# EAGLE board ShutdownThree (EAGLE 7.7.0)
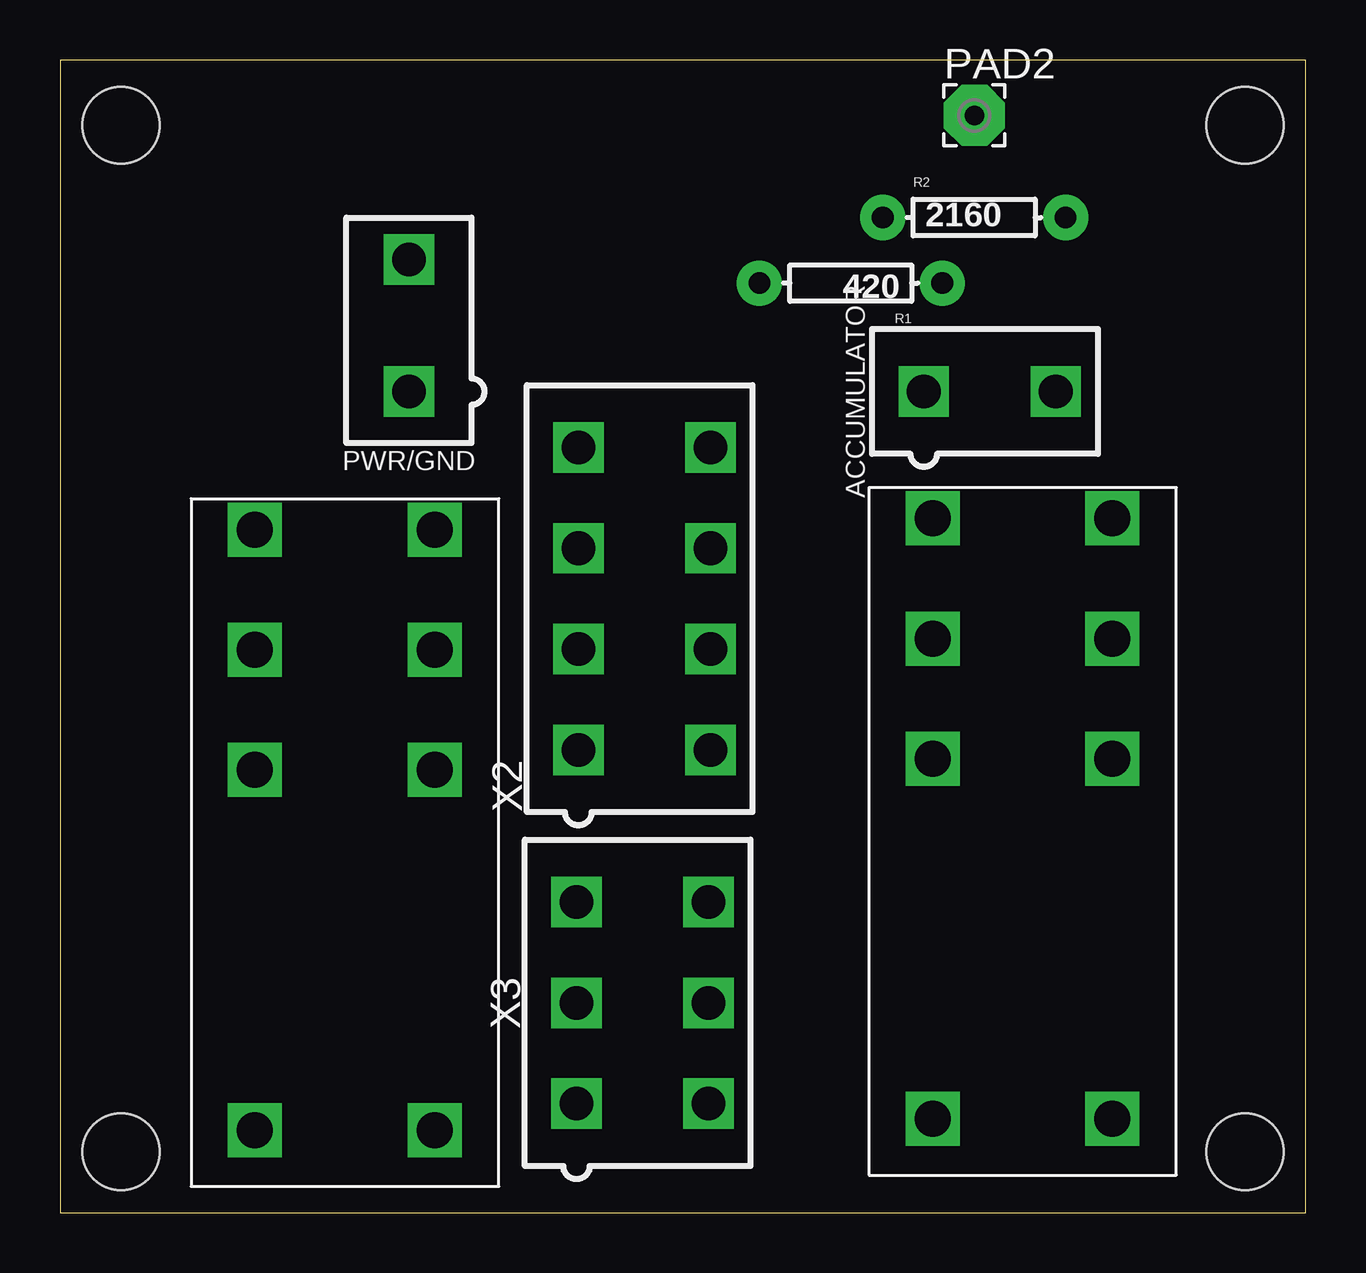
[diagram p0: board, top side]
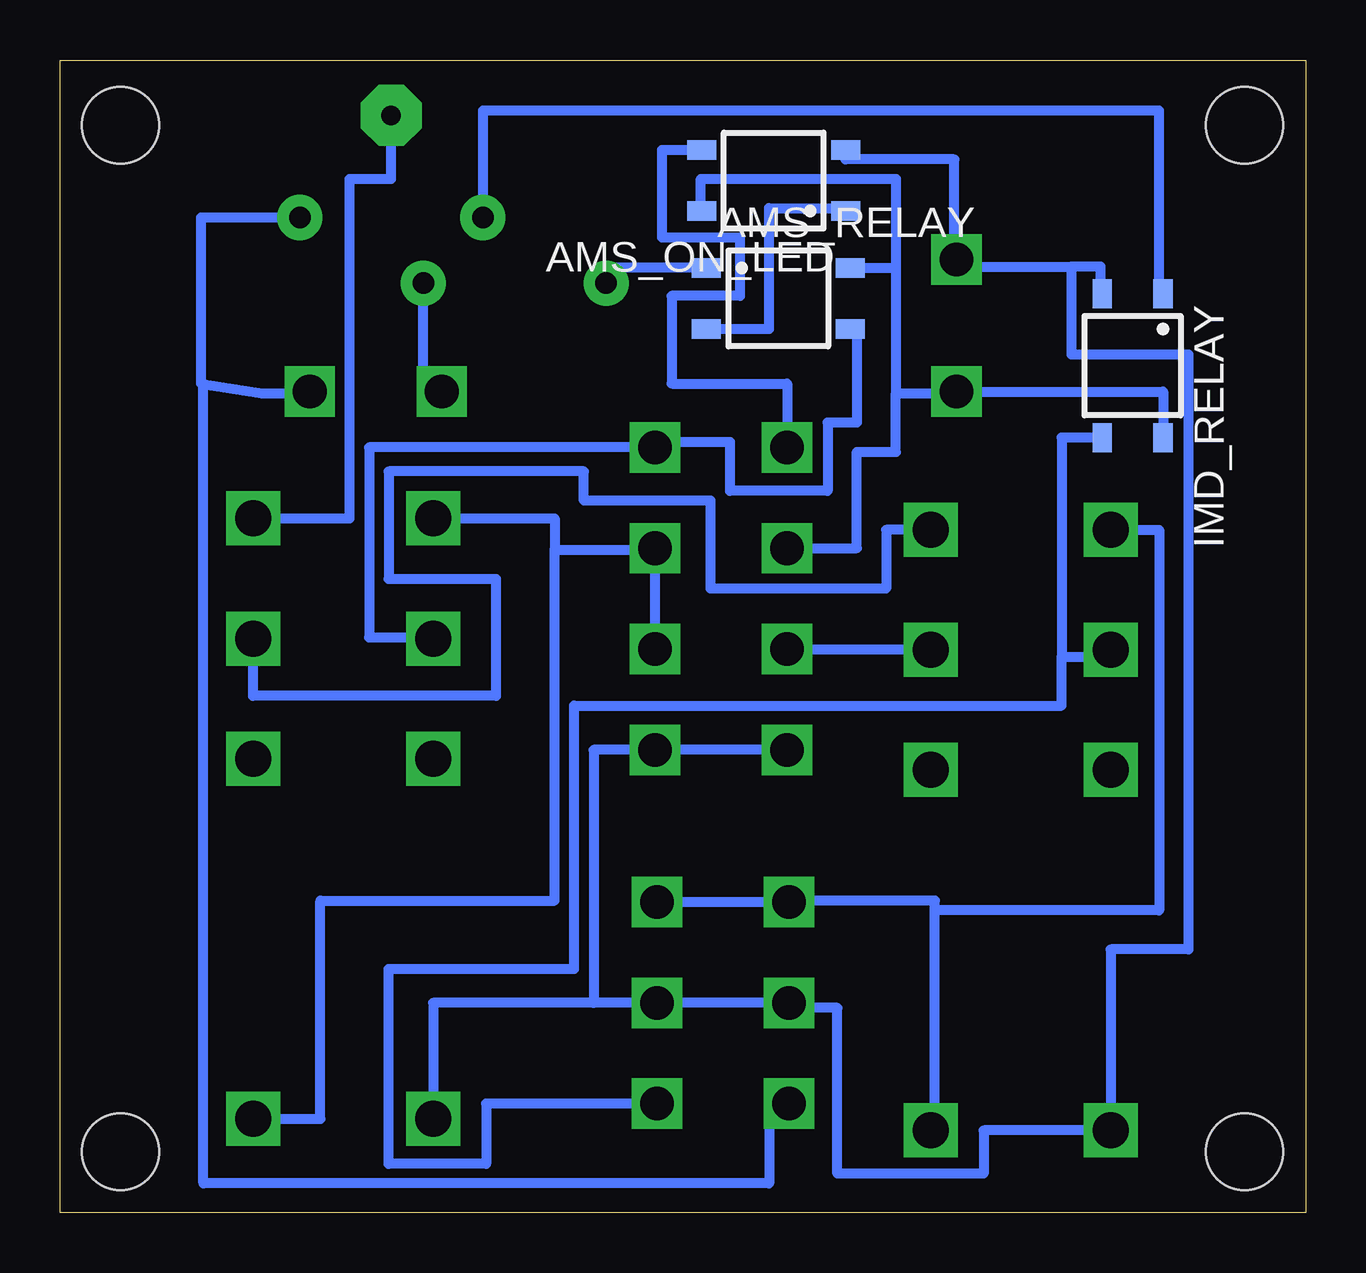
[diagram p1: board, bottom side, seen from below]

Size 51.9 x 48.03 mm. Coordinates in mm from the lower left corner, seen from the top.
Outline: 0,0 51.9,0 51.9,48.03 0,48.03 0,0
Copper layers (1*16): Top 0.035mm / dielectric 1.5mm / Bottom 0.035mm
Design rules "default *": minimum track width 0.00040625mm, minimum drill 24mil, track to track 16mil, track to pad 16mil, pad to pad 16mil, via to via 16mil, smd to smd 8mil, copper to edge 40mil, drill to drill 8mil, minimum pad ring 10mil, minimum via ring 8mil, stop-mask expansion 4mil, vias tented up to drill 0mil, thermal gap 10mil
Holes 3.2 mm at 2.54,2.54 2.54,45.31 49.38,45.31 49.38,2.54

## Footprints (pad centres in the part's own frame; a part is rotated, then mirrored left to right if it is on the bottom)
MINIFIT_5566-2 = drill 1.4 square: 1 0,-2.75; 2 0,2.75
SOP04 = smd 0.8 x 1.2: 1 -1.27,-3; 2 1.27,-3; 3 1.27,3; 4 -1.27,3
G2RL-2 = drill 1.5 square: 2 10.008,0; 3 5.004,0; 4 0,0; 5 0,7.493; 6 5.004,7.493; 7 10.008,7.493; COIL+ 25.019,0; COIL- 25.019,7.493
2,54/0,8 = drill 0.813 pad 2.54 octagon: 1 0,0
AXIAL-0.3EZ = drill 0.9 pad 1.88: P$1 -3.81,0; P$2 3.81,0
MINIFIT_5566-8 = drill 1.4 square: 1 6.3,-2.75; 2 2.1,-2.75; 3 -2.1,-2.75; 4 -6.3,-2.75; 5 6.3,2.75; 6 2.1,2.75; 7 -2.1,2.75; 8 -6.3,2.75
MINIFIT_5566-6 = drill 1.4 square: 1 4.2,-2.75; 2 0,-2.75; 3 -4.2,-2.75; 4 4.2,2.75; 5 0,2.75; 6 -4.2,2.75

## Placement (x,y rotation side)
ACCUMULATOR  CONNECTOR-2  [MINIFIT_5566-2]  38.74,34.23 270 top
AMS_ON_LED  CPC1002N  [SOP04]  22.16,43.01 90 bottom
AMS_RELAY  CPC1002N  [SOP04]  21.97,38.1 270 bottom
IMD  G2RL-2-DC12  [G2RL-2]  8.12,28.46 270 top
IMD_RELAY  CPC1002N  [SOP04]  7.21,35.3 180 bottom
PAD2  WIREPAD2,54/0,8  [2,54/0,8]  38.1,45.72 0 top
PWR/GND  MINIFIT_5566-2  [MINIFIT_5566-2]  14.54,36.96 0 top
R1  420  [AXIAL-0.3EZ]  32.95,38.73 180 top
R2  2160  [AXIAL-0.3EZ]  38.09,41.47 0 top
U$7  G2RL-2-DC12  [G2RL-2]  36.35,28.93 270 top
X2  CONNECTOR-8  [MINIFIT_5566-8]  24.35,25.59 270 top
X3  CONNECTOR-6  [MINIFIT_5566-6]  24.27,8.75 270 top

## Library data of the parts
ACCUMULATOR PWR/GND = HyTechDevices; OC_FARNELL: 1822072; OC_NEWARK: unknown
AMS_ON_LED AMS_RELAY IMD IMD_RELAY R1 R2 U$7 = HyTechDevices
PAD2 = wirepad
X2 = HyTechDevices; OC_FARNELL: unknown; OC_NEWARK: unknown
X3 = HyTechDevices; MPN: 95566-61002; OC_FARNELL: unknown; OC_NEWARK: 22K8620

## Nets
+12V: AMS_ON_LED.4 AMS_RELAY.4 IMD_RELAY.4 PWR/GND.1 X2.3
AMS: ACCUMULATOR.1 R1.P$1
GND: AMS_ON_LED.2 IMD.COIL+ IMD_RELAY.2 PWR/GND.2 U$7.COIL+ X2.1 X2.5 X3.2 X3.5
IMD: ACCUMULATOR.2 R2.P$2 X3.1
N$1: IMD.6 X2.2
N$2: IMD.5 U$7.6
N$3: AMS_ON_LED.3 X2.4
N$4: AMS_RELAY.1 R1.P$2
N$5: AMS_RELAY.3 U$7.3 X2.8
N$10: PAD2.1 U$7.5
N$12: IMD.3 IMD_RELAY.3 X3.4
N$14: IMD_RELAY.1 R2.P$1
N$17: U$7.4 U$7.COIL- X2.6 X2.7
N$22: IMD.4 IMD.COIL- X3.3 X3.6
N$24: AMS_ON_LED.1 AMS_RELAY.2

## Tracks (layer width: path | path; a pad name or v marks a point on that pad's centre or on a via)
+12V
  Bottom 0.406: IMD_RELAY.4 5.93,34.21 PWR/GND.1 14.54,34.14 17.07,34.14 | AMS_RELAY.4 17.07,39.37 | 17.07,39.37 17.07,34.14 | X2.3 18.69,27.69 18.69,31.7 17.07,31.7 17.07,34.14 | AMS_ON_LED.4 25.2,41.74 25.2,43.08 17.07,43.08 17.07,39.37
AMS
  Bottom 0.406: ACCUMULATOR.1 36.76,34.23 R1.P$1
GND
  Bottom 0.406: IMD_RELAY.2 8.53,38.3 8.53,39.42 9.75,39.42 | AMS_ON_LED.2 19.16,43.89 14.63,43.89 14.63,39.71 PWR/GND.2 14.54,39.42 9.75,39.42 | 29.67,8.75 X3.5 X3.2 21.52,8.53 19.51,8.53 19.51,1.63 13.41,1.63 13.41,3.44 IMD.COIL+ | 29.67,8.75 36.35,8.75 U$7.COIL+ | 9.75,39.42 9.75,35.76 4.88,35.76 4.88,10.97 8.12,10.97 IMD.COIL+ | 8.12,3.25 IMD.COIL+ | X2.1 X2.5 29.67,19.29 29.67,8.75
IMD
  Bottom 0.406: R2.P$2 46.02,41.47 46.02,34.54 | 46.02,34.54 43.48,34.14 41.49,34.14 ACCUMULATOR.2 | X3.1 22.35,4.55 22.35,1.22 45.92,1.22 45.92,34.54 46.02,34.54
N$1
  Bottom 0.406: IMD.6 21.6,23.45 X2.2
N$2
  Bottom 0.406: IMD.5 17.48,28.46 17.48,26.01 24.79,26.01 24.79,29.67 30.07,29.67 30.07,30.89 38.2,30.89 38.2,26.42 33.73,26.42 33.73,21.54 43.85,21.54 U$7.6
N$3
  Bottom 0.406: AMS_ON_LED.3 26.82,44.28 26.82,40.64 23.57,40.64 23.57,38.2 26.42,38.2 26.42,34.54 21.6,34.54 X2.4
N$4
  Bottom 0.406: AMS_RELAY.1 29.14,39.37 R1.P$2
N$5
  Bottom 0.406: AMS_RELAY.3 18.69,36.83 18.69,32.92 19.91,32.92 19.91,30.07 23.98,30.07 23.98,32.11 27.1,32.11 X2.8 39.01,31.89 39.01,23.98 36.35,23.98 U$7.3
N$10
  Bottom 0.406: U$7.5 39.83,28.93 39.83,43.08 38.1,43.08 PAD2.1
N$12
  Bottom 0.406: IMD_RELAY.3 10.16,32.3 10.16,23.16 | 10.16,23.16 8.12,23.16 IMD.3 | X3.4 34.14,4.55 34.14,2.03 38.2,2.03 38.2,10.16 30.48,10.16 30.48,21.13 10.16,21.13 10.16,23.16
N$14
  Bottom 0.406: IMD_RELAY.1 6.1,38.3 6.1,45.92 34.28,45.92 R2.P$1
N$17
  Bottom 0.406: U$7.4 31.29,28.93 31.29,27.64 | 31.29,27.64 27.1,27.64 X2.7 X2.6 | U$7.COIL- 41.05,3.91 41.05,13.01 31.29,13.01 31.29,27.64
N$22
  Bottom 0.406: IMD.COIL- 15.44,3.44 15.44,12.6 | X3.6 X3.3 21.52,13.01 15.44,13.01 15.44,12.6 | IMD.4 6.1,28.46 6.1,12.6 15.44,12.6
N$24
  Bottom 0.406: AMS_RELAY.2 22.35,36.83 22.35,41.86 19.16,41.86 AMS_ON_LED.1